# Altium PCB PCB1.PcbDoc
Units mm, origin at the board's own origin, x right, y up, seen from the top; angles counter-clockwise.
Board outline 101.33 x 51.28 mm, 2 copper layers (Top Layer, Bottom Layer), stack 1.47 mm thick; 135 components, 70 nets, 381 pads, 0 vias.
Unrouted connection lines stored in the file: 229.
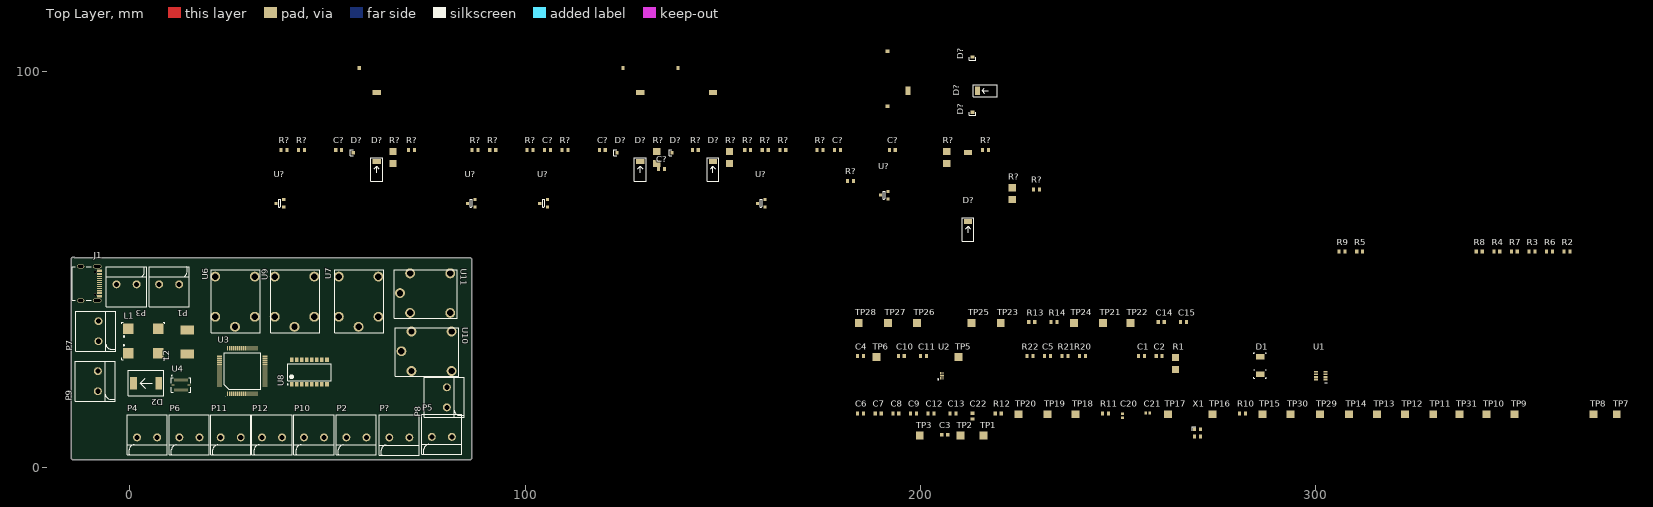
[diagram p0: Top Layer view]
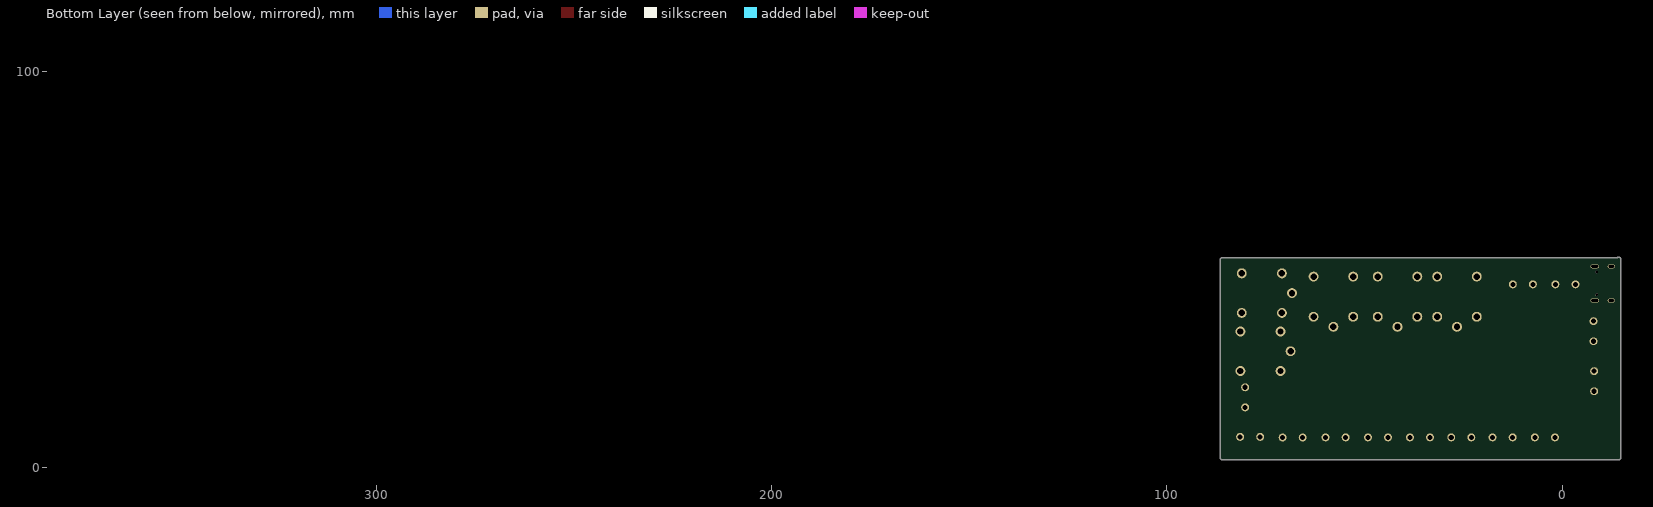
[diagram p1: Bottom Layer view, seen from below]

## Layer stack, top to bottom
Top Solder: solder mask 0.0254, SM-002, Dk 4
Top Layer: signal copper 0.035
Dielectric 1: dielectric 1.4, FR-4, Dk 4.8
Bottom Layer: signal copper 0.035
Bottom Solder: solder mask 0.0254, SM-002, Dk 4

## Board outline
-14.3,1.875 cw(c-14.3,2.375) -14.766,2.556 -14.775,2.65 -14.775,52.65 cw(c-14.275,52.65) -13.895,52.975 85.9,52.975 85.962,52.971 cw(c86.025,52.475) 86.525,52.475 86.525,2.375 cw(c86.025,2.375) 86.025,1.875

## Design rules (kind name [scope] priority, off if disabled: settings)
Clearance [All] p1: gap=0.2 ignorepadtopadclearanceinfootprint=FALSE except(0: Arc-Hole Track-Hole SMDPad-Hole THPad-Hole Via-Hole Fill-Hole Poly-Hole Region-Hole Text-Hole)
HoleToHoleClearance [All] p1: gap=0.2 allowstackedmicrovias=TRUE
PolygonConnect [All] p1: connectstyle=Relief reliefconductorwidth=0.254 reliefentries=4 polygonreliefangle="90 Angle" airgapwidth=0.254
RoutingVias [All] p1: holewidth=0.15 width=0.3 viastyle="Through Hole" minholewidth=0.15 minwidth=0.3 maxholewidth=0.3 maxwidth=0.45
SilkToSilkClearance [All] p1: silktosilkclearance=0.1
SilkToSolderMaskClearance [IsPad] p1: minsilkscreentomaskgap=0.1 clearancetoexposedcopper=TRUE
SolderMaskExpansion [All] p1: expansion=0.102 istentingtop=FALSE
UnRoutedNet [All] p1: checkbadconnections=TRUE
Width [All] p1: maxlimit=1.2 minlimit=0.2 preferedwidth=0.254
26 further rules are at their usual default settings.

## Classes and differential pairs
component class Designator: C? D? P2 P3 P4 P5 P6 P7 P8 P9 P10 P11 P12 P? R2 R3 R4 R5 R6 R7 R8 R9 R? U6 U7 U8 U9 U10 U11 U?

## Components (designator, comment, footprint, x,y, rotation, side; value= is the part's Value field where it differs from the comment)
C1 "4.7uF" CAP_0603 255.987,28.075 r0 top
C2 "4.7uF" CAP_0603 260.437,28.075 r0 top
C3 "10nF" CAP_0603 206.184,8.199 r0 top
C4 "100nF" CAP_0603 184.908,28.075 r0 top
C5 "100nF" CAP_0603 232.161,28.075 r0 top
C6 "100nF" CAP_0603 184.908,13.599 r0 top
C7 "100nF" CAP_0603 189.358,13.599 r0 top
C8 "100nF" CAP_0603 193.809,13.599 r0 top
C9 "100nF" CAP_0603 198.259,13.599 r0 top
C10 "100nF" CAP_0603 195.209,28.075 r0 top
C11 "100nF" CAP_0603 200.784,28.075 r0 top
C12 "100nF" CAP_0603 202.709,13.599 r0 top
C13 "100nF" CAP_0603 208.284,13.599 r0 top
C14 "100nF" CAP_0603 260.962,36.7 r0 top
C15 "100nF" CAP_0603 266.562,36.7 r0 top
C20 "10pF" CAP_0402 251.187,12.999 r90 top
C21 "10pF" CAP_0402 257.537,13.699 r0 top
C22 "100nF" CAP_0603 213.21,12.899 r90 top
C? "100pF" CAP_0603 52.854,80.236 r0 top
C? "100pF" CAP_0603 179.085,80.236 r0 top
C? "100pF" CAP_0603 105.682,80.236 r0 top
C? "100pF" CAP_0603 119.558,80.236 r0 top
C? "100pF" CAP_0603 192.936,80.236 r0 top
C? "4.7uF" CAP_0603 134.508,75.486 r0 top
D1 "STPS360-Y" SOD-128 285.988,25.725 r90 top value=STPS360
D2 "LNBTVS3-220U" SMC-DO-214AB 4.15,21.25 r180 top
D? "GREEN" LED_0603_GREEN 124.008,79.536 r0 top
D? "GREEN" LED_0603_GREEN 213.177,90.55 r90 top
D? "D_SMA" "DO-214AC-2 (SMA)" 62.455,75.311 r90 top
D? "D_SMA" "DO-214AC-2 (SMA)" 147.559,75.311 r90 top
D? "GREEN" LED_0603_GREEN 57.305,79.536 r0 top
D? "D_SMA" "DO-214AC-2 (SMA)" 212.075,60.137 r90 top
D? "GREEN" LED_0603_GREEN 137.958,79.536 r0 top
D? "GREEN" LED_0603_GREEN 213.177,104.475 r90 top
D? "D_SMA" "DO-214AC-2 (SMA)" 216.427,95.25 r180 top
D? "D_SMA" "DO-214AC-2 (SMA)" 129.158,75.311 r90 top
J1 "USB4105-GF-A-060" USB4105-GF-A-060 -10.025,46.475 r270 top
L1 "" "WE-SL5 HC" 3.425,31.95 r0 top value=5uH
L2 "3.3uH" ASPI-0630HI-6R8M-T15 14.6,31.65 r90 top
P1 "WJ500V-5.08-2P" WJ500V-5.08-2P 15.045,50.695 r180 top
P2 "WJ500V-5.08-2P" WJ500V-5.08-2P 52.259,3.08 r0 top
P3 "WJ500V-5.08-2P" WJ500V-5.08-2P 4.27,50.695 r180 top
P4 "WJ500V-5.08-2P" WJ500V-5.08-2P -0.687,3.08 r0 top
P5 "WJ500V-5.08-2P" WJ500V-5.08-2P 73.885,3.205 r0 top
P6 "WJ500V-5.08-2P" WJ500V-5.08-2P 10.014,3.08 r0 top
P7 "WJ500V-5.08-2P" WJ500V-5.08-2P -3.48,29.31 r90 top
P8 "WJ500V-5.08-2P" WJ500V-5.08-2P 84.67,12.58 r90 top
P9 "WJ500V-5.08-2P" WJ500V-5.08-2P -3.63,16.66 r90 top
P10 "WJ500V-5.08-2P" WJ500V-5.08-2P 41.539,3.08 r0 top
P11 "WJ500V-5.08-2P" WJ500V-5.08-2P 20.464,3.08 r0 top
P12 "WJ500V-5.08-2P" WJ500V-5.08-2P 30.915,3.08 r0 top
P? "WJ500V-5.08-2P" WJ500V-5.08-2P 63.13,3.055 r0 top
R1 "R1206" RES_1206 264.587,26.2 r90 top
R2 "100R" RES_0603 363.642,54.526 r0 top
R3 "100R" RES_0603 354.742,54.526 r0 top
R4 "100R" RES_0603 345.866,54.526 r0 top
R5 "100R" RES_0603 311.164,54.526 r0 top
R6 "100R" RES_0603 359.192,54.526 r0 top
R7 "100R" RES_0603 350.291,54.526 r0 top
R8 "100R" RES_0603 341.416,54.526 r0 top
R9 "100R" RES_0603 306.714,54.526 r0 top
R10 "0R" RES_0603 281.513,13.599 r0 top
R11 "10K" RES_0603 246.886,13.599 r0 top
R12 "10K" RES_0603 219.735,13.599 r0 top
R13 "4.7K" RES_0603 228.21,36.7 r0 top
R14 "4.7K" RES_0603 233.811,36.7 r0 top
R20 "100k" RES_0603 241.061,28.075 r0 top
R21 "142K" RES_0603 236.611,28.075 r0 top
R22 "13.6k" RES_0603 227.735,28.075 r0 top
R? "R0603" RES_0603 87.381,80.236 r0 top
R? "R0603" RES_0603 143.084,80.236 r0 top
R? "R0603" RES_0603 71.255,80.236 r0 top
R? "R1206" RES_1206 151.709,78.361 r90 top
R? "R0603" RES_0603 43.429,80.236 r0 top
R? "R0603" RES_0603 174.635,80.236 r0 top
R? "R0603" RES_0603 216.487,80.236 r0 top
R? "R0603" RES_0603 101.257,80.236 r0 top
R? "R0603" RES_0603 165.235,80.236 r0 top
R? "R1206" RES_1206 133.308,78.361 r90 top
R? "R0603" RES_0603 91.831,80.236 r0 top
R? "R0603" RES_0603 110.132,80.236 r0 top
R? "R1206" RES_1206 206.712,78.361 r90 top
R? "R0603" RES_0603 182.325,72.387 r0 top
R? "R0603" RES_0603 39.004,80.236 r0 top
R? "R0603" RES_0603 156.334,80.236 r0 top
R? "R1206" RES_1206 66.63,78.361 r90 top
R? "R1206" RES_1206 223.3,69.187 r90 top
R? "R0603" RES_0603 229.375,70.262 r0 top
R? "R0603" RES_0603 160.785,80.236 r0 top
TP1 "Pad" PAD_SQ_2MM 215.985,7.974 r0 top
TP2 "Pad" PAD_SQ_2MM 210.134,7.974 r0 top
TP3 "Pad" PAD_SQ_2MM 199.859,7.974 r0 top
TP5 "Pad" PAD_SQ_2MM 209.709,27.875 r0 top
TP6 "Pad" PAD_SQ_2MM 188.883,27.875 r0 top
TP7 "Pad" PAD_SQ_2MM 376.218,13.374 r0 top
TP8 "Pad" PAD_SQ_2MM 370.367,13.374 r0 top
TP9 "Pad" PAD_SQ_2MM 350.341,13.374 r0 top
TP10 "Pad" PAD_SQ_2MM 343.241,13.374 r90 top
TP11 "Pad" PAD_SQ_2MM 329.79,13.374 r90 top
TP12 "Pad" PAD_SQ_2MM 322.665,13.374 r90 top
TP13 "Pad" PAD_SQ_2MM 315.565,13.374 r90 top
TP14 "Pad" PAD_SQ_2MM 308.464,13.374 r90 top
TP15 "Pad" PAD_SQ_2MM 286.613,13.374 r90 top
TP16 "Pad" PAD_SQ_2MM 273.913,13.374 r90 top
TP17 "Pad" PAD_SQ_2MM 262.687,13.374 r90 top
TP18 "Pad" PAD_SQ_2MM 239.311,13.374 r90 top
TP19 "Pad" PAD_SQ_2MM 232.186,13.374 r90 top
TP20 "Pad" PAD_SQ_2MM 224.835,13.374 r90 top
TP21 "Pad" PAD_SQ_2MM 246.261,36.5 r90 top
TP22 "Pad" PAD_SQ_2MM 253.137,36.5 r90 top
TP23 "Pad" PAD_SQ_2MM 220.36,36.5 r90 top
TP24 "Pad" PAD_SQ_2MM 238.911,36.5 r90 top
TP25 "Pad" PAD_SQ_2MM 213.01,36.5 r90 top
TP26 "Pad" PAD_SQ_2MM 199.159,36.5 r90 top
TP27 "Pad" PAD_SQ_2MM 191.809,36.5 r90 top
TP28 "Pad" PAD_SQ_2MM 184.433,36.5 r90 top
TP29 "Pad" PAD_SQ_2MM 301.089,13.374 r90 top
TP30 "Pad" PAD_SQ_2MM 293.714,13.374 r90 top
TP31 "Pad" PAD_SQ_2MM 336.391,13.374 r90 top
U1 "SY8303AIC" TSOT23-8 301.289,23.15 r90 top
U2 "MIC5528-3.3YMT-TR" TDFN-6 205.534,23.15 r90 top
U3 "STM32L072RBT6" "LQFP64 - 64-pin" 24.7,18.55 r0 top
U4 "BMI088" BMI088 12.975,20.775 r0 top
U6 "SRA-05VDC-CL" SRA-05VDC-CL 32.979,33.986 r90 top
U7 "SRA-05VDC-CL" SRA-05VDC-CL 64.246,33.986 r90 top
U8 "SFH6916" VISH-SOP-16_V 45.45,24.025 r90 top
U9 "SRA-05VDC-CL" SRA-05VDC-CL 48.029,33.986 r90 top
U10 "SRA-05VDC-CL" SRA-05VDC-CL 67.201,22.975 r0 top
U11 "SRA-05VDC-CL" SRA-05VDC-CL 66.861,37.679 r0 top
U? "S9013" SOT-23-3 159.785,66.736 r90 top
U? "S9013" SOT-23-3 38.004,66.736 r90 top
U? "S9013" SOT-23-3 86.381,66.736 r90 top
U? "S9013" SOT-23-3 190.9,68.825 r90 top
U? "S9013" SOT-23-3 104.682,66.736 r90 top
X1 "24MHz" XTAL_2520 270.137,8.674 r90 top

## Footprints (in the part's own frame and the unit in brackets; to place one, negate y for a bottom-side part, rotate by r counter-clockwise, add the part's x,y. Pads: shape width x height; smd on the part's side, far side on the other; paste and mask are expansions set on the pad)
ASPI-0630HI-6R8M-T15 [mm]
  rect 2.35x3.4 smd: 1(-3.025,0) 2(3.025,0)
  body extent -3.6,-3.32 3.6,3.32, height 3.01
BMI088 [mm]
  rect 0.3x0.75 smd: 1(-1.5,1.3) 2(-1,1.3) 3(-0.5,1.3) 4(0,1.3) 5(0.5,1.3) 6(1,1.3) 7(1.5,1.3) 9(1.5,-1.3) 10(1,-1.3) 11(0.5,-1.3) 12(0,-1.3) 13(-0.5,-1.3) 14(-1,-1.3) 15(-1.5,-1.3)
  rect 0.75x0.3 smd: 8(2.05,0) 16(-2.05,0)
  silkscreen extent -2.5,-1.8 2.5,2.51, body extent -2.25,-1.5 2.25,1.5, height 1.01
CAP_0402 [mm]
  rect 0.6x0.7 smd: 1(-0.5,0) 2(0.5,0)
  body extent -0.5,-0.26 0.5,0.26, height 0.37
CAP_0603 [mm]
  rect 0.8x1 smd: 1(-0.75,0) 2(0.75,0)
  body extent -0.8,-0.4 0.8,0.4, height 0.51
"DO-214AC-2 (SMA)" [mm]
  rect 1.27x2.1 smd: A(19.477,0) K(1.985,0)
  silkscreen extent -3,-1.5 3,1.5, body extent -2.6,-1.3 2.6,1.3, height 2.42
LED_0603_GREEN [mm]
  rect 0.8x1 smd: A(0.75,21.462) K(-0.75,0)
  silkscreen extent -1.5,-0.8 -0.8,0.8, body extent -0.8,-0.4 0.8,0.4, height 0.6
"LQFP64 - 64-pin" [mm] "LQFP64 - 64-pin"
  rect 0.3x1.2 smd: 1(0,0) 2(0.5,0) 3(1,0) 4(1.5,0) 5(2,0) 6(2.5,0) 7(3,0) 8(3.5,0) 9(4,0) 10(4.5,0) 11(5,0) 12(5.5,0) 13(6,0) 14(6.5,0) 15(7,0) 16(7.5,0) 33(7.5,11.5) 34(7,11.5) 35(6.5,11.5) 36(6,11.5) 37(5.5,11.5) 38(5,11.5) 39(4.5,11.5) 40(4,11.5) 41(3.5,11.5) 42(3,11.5) 43(2.5,11.5) 44(2,11.5) 45(1.5,11.5) 46(1,11.5) 47(0.5,11.5) 48(0,11.5)
  rect 1.2x0.3 smd: 17(9.5,2) 18(9.5,2.5) 19(9.5,3) 20(9.5,3.5) 21(9.5,4) 22(9.5,4.5) 23(9.5,5) 24(9.5,5.5) 25(9.5,6) 26(9.5,6.5) 27(9.5,7) 28(9.5,7.5) 29(9.5,8) 30(9.5,8.5) 31(9.5,9) 32(9.5,9.5) 49(-2,9.5) 50(-2,9) 51(-2,8.5) 52(-2,8) 53(-2,7.5) 54(-2,7) 55(-2,6.5) 56(-2,6) 57(-2,5.5) 58(-2,5) 59(-2,4.5) 60(-2,4) 61(-2,3.5) 62(-2,3) 63(-2,2.5) 64(-2,2)
  silkscreen extent -0.82,-0.79 8.41,10.44, body extent -2.32,-0.29 9.68,11.72, height 1.5
PAD_SQ_2MM [mm]
  rect 2x2 smd paste-1: 1(0,0)
RES_0603 [mm]
  rect 0.8x1 smd: 1(-0.75,0) 2(0.75,0)
  body extent -0.8,-0.43 0.8,0.43, height 0.52
RES_1206 [mm]
  rect 1.8x1.84 smd: 1(-1.5,0) 2(1.5,0)
  body extent -1.6,-0.83 1.6,0.83, height 0.57
SMC-DO-214AB [mm]
  rect 1.72x3.2 smd: A(-3.2,0) K(3.2,0)
  silkscreen extent -4.5,-3.25 4.5,3.25, body extent -3.98,-2.95 3.98,2.95, height 2.32
SOD-128 [mm] "Diode SOD-128 Footprint"
  rect 1.4x2.1 smd: 1(-2.2,0) 2(2.2,0)
  silkscreen extent -3.18,-1.58 3.18,1.58, body extent -2.5,-1.35 2.5,1.35, height 1.1
SOT-23-3 [mm]
  rect 0.764x0.8 smd: 1(-0.96,-0.97) 2(0.96,-0.97) 3(0,0.97)
  silkscreen extent -1,-0.25 1,0.25, body extent -1.45,-1.15 1.45,1.15, height 1.01
SRA-05VDC-CL [mil] "5V 10A 20A@14VAC SPDT (1 Form C) 5 Plugin,12.4x16mm Power Relays ROHS"
  round 99 hole 63 mask+4: 1(60,250) 2(160,53) 3(560,53) 4(560,447) 5(160,447)
  silkscreen extent 0,0 630,485, body extent 0,0 625,475, height 559
TDFN-6 [mm]
  rect 0.6x0.2 smd mask+0.05: 1(-0.65,0.4) 2(-0.65,0) 3(-0.65,-0.4) 4(0.65,-0.4) 5(0.65,0) 6(0.65,0.4)
  rect 0.35x0.99 smd mask+0.05: 7(0,0)
  silkscreen extent -1.07,0.87 -0.83,1.12, body extent -0.65,-0.6 0.65,0.6, height 0.6
TSOT23-8 [mm]
  rect 0.45x1 smd: 1(-0.975,-1.2) 2(-0.325,-1.2) 3(0.325,-1.2) 4(0.975,-1.2) 5(0.975,1.2) 6(0.325,1.2) 7(-0.325,1.2) 8(-0.975,1.2)
  silkscreen extent -1.75,-1.63 -1.75,-1, body extent -1.45,-1.4 1.45,1.4, height 1.01
USB4105-GF-A-060 [mm]
  rect 0.6x1.15 smd mask+0.05: A1B12(-3.2,2.378) A4B9(-2.4,2.378) B1A12(3.2,2.378) B4A9(2.4,2.378)
  rect 0.3x1.15 smd mask+0.05: A5(-1.25,2.378) A6(-0.25,2.378) A7(0.25,2.378) A8(1.25,2.378) B5(1.75,2.378) B6(0.75,2.378) B7(-0.75,2.378) B8(-1.75,2.378)
  round 0.65 hole 0.65 unplated mask+0.05: MH(-2.89,1.303) MH(2.89,1.303)
  oval 1x2.1 hole 0.6 slot 1.7 at 90 deg: SH(-4.32,1.803) SH(4.32,1.803)
  oval 1x1.8 hole 0.6 slot 1.4 at 90 deg: SH(-4.32,-2.377) SH(4.32,-2.377)
  silkscreen extent -4.25,-4.5 4.25,0.25, body extent -4.47,-4.97 4.47,2.73, height 3.27
VISH-SOP-16_V [mm] "SOP, 16-Leads, Body 10.77x4.575mm, Pitch 1.27mm"
  rect 1.14x0.91 smd: 1(-3.11,4.445) 2(-3.11,3.175) 3(-3.11,1.905) 4(-3.11,0.635) 5(-3.11,-0.635) 6(-3.11,-1.905) 7(-3.11,-3.175) 8(-3.11,-4.445) 9(3.11,-4.445) 10(3.11,-3.175) 11(3.11,-1.905) 12(3.11,-0.635) 13(3.11,0.635) 14(3.11,1.905) 15(3.11,3.175) 16(3.11,4.445)
  silkscreen extent -3.23,-5.5 2.15,5.57, body extent -3.44,-5.38 3.44,5.39, height 2.12
"WE-SL5 HC" [mm] "Common Mode Choke WE-SL5 HC Footprint"
  rect 2.7x2.7 smd: 1(-3.8,3.1) 2(-3.8,-3.1) 3(3.8,-3.1) 4(3.8,3.1)
  silkscreen extent -5.42,-4.73 5.42,4.72, body extent -4.75,-4.15 4.75,4.15, height 5.3
WJ500V-5.08-2P [mil] "1x2P 18A -40?~+105? 250V Green 14~30 Straight 5.08mm 2.5 1 2 Plugin,P=5.08mm Screw terminal ROHS"
  round 78.75 hole 51: 1(100,175) 2(300,175)
  silkscreen extent 0,0 400,400, body extent 3,1 397,355, height 994
XTAL_2520 [mm]
  rrect10% 0.9x0.8 smd mask+0: 1(-0.925,-0.725) 2(0.925,-0.725) 3(0.925,0.725) 4(-0.925,0.725)
  silkscreen extent 0.54,0.4 1.6,1.36, body extent -1.25,-1 1.25,1, height 0.8

## Part data
C1 C2 C3 C5 C?: library part CAP_0603_25V, "Capacitor SMD 0603 25V"
C4 C6 C7 C8 C9 C10 C11 C12 C13 C14 C15 C22 C? C? C? C? C?: library part CAP_0603_16V, "Capacitor SMD 0603 16V"
C20 C21: library part CAP_0402_16V, "Capacitor SMD 0402 16V"
D1: library part CMP-01-D000008-4, "Schottky 60V 3A Vf=0.610V SOD-128 -40°C +175°C", Current - Average Rectified=3A, Current - Reverse Leakage="150µA @ 60V", Internal Part Number=01D008, Manufacturer=STMicroelectronics, Manufacturer Part Number=STPS360AFY, Max Temperature=175°C, Min Temperature=-40°C, Package/Case=SOD-128, Ratings=AEC-Q101, Voltage - DC Reverse=60V, Voltage - Forward=610mV, Mounting Technology="Surface Mount", Pins=2, RoHS Compliant=YES
D2: library part D_TVS_BI_SMC, "Diode TVS / ESD Bidirectional SMC (DO-214AB)"
D? D? D? D? D?: library part LED_0603_GREEN, "LED 0603 GREEN SMD"
D? D? D? D? D?: "Diode SMD SMA (DO-214AA)"
J1: "USB Connector Type C SMT 12 Pin", Manufacturer=GCT, Manufacturer Part Number=USB4105-GF-A-060
L1: library part CMP-01-CMC000005-2, "5uH 5A 5.5mΩ 80V -40°C +125°C", Current Rating (Max)=5A, DC Resistance (DCR) (Max)=5.5mΩ, Impedance @ Frequency="500 Ohms @ 130MHz", Inductor Type="Common Mode Choke", Internal Part Number=01L003, Manufacturer="Wurth Elektronik", Manufacturer Part Number=744273501, Max Temperature=125°C, Min Temperature=-40°C, Package/Case="WE-SL5 HC", Voltage Rating=80V, Height (Max)=5.3mm, Mounting Technology=SMT, Pins=4, RoHS Compliant=YES, Shielding=Unshielded, Size / Dimension="9.50mm x 8.30mm"
L2: library part ASPI-0630HI-6R8M-T15, "6.5A 3.3uH ±20% 23mΩ SMD,6.6x7.2mm Inductors (SMD) ROHS", Manufacturer="SHOU HAN", Manufacturer Part Number=CYA0630-3.3UH
P1 P2 P3 P4 P5 P6 P7 P8 P9 P10 P11 P12 P?: "1x2P 18A -40℃~+105℃ 250V Green 14~30 Straight 5.08mm 2.5 1 2 Plugin,P=5.08mm Screw terminal ROHS"
R1 R? R? R? R? R?: library part RES_1206, "Resistor SMD 1206"
R2 R3 R4 R5 R6 R7 R8 R9 R10 R11 R12 R13 R14 R20 R21 R22 R? R? R? R? R? R? R? R? R? R? R? R? R? R? R?: library part RES_0603, "Resistor SMD 0603"
TP1 TP2 TP3 TP5 TP6 TP7 TP8 TP9 TP10 TP11 TP12 TP13 TP14 TP15 TP16 TP17 TP18 TP19 TP20 TP21 TP22 TP23 TP24 TP25 TP26 TP27 TP28 TP29 TP30 TP31: library part PAD_SQ_2MM, "Test Point Square 2mm"
U1: "High Efficiency Fast Response, 3A, 40V Input Synchronous Step Down Regulator", LCSC=C97054, Manufacturer=Silergy, Distributor Link=https://www.lcsc.com/product-detail/DC-DC-Converters_Silergy-Corp-SY8303AIC_C97054.html, Manufacturer Part Number=SY8303AIC
U2: "LDO Regulator 3V3 500mA 2.5V<Vin<5.5V", Manufacturer=Microchip, Manufacturer Part Number=MIC5528-3.3YMT-TR
U3: "128KB 1.8V~3.6V ARM-MSeries 20KB 32MHz FLASH 51 LQFP-64(10x10) Microcontroller Units (MCUs/MPUs/SOCs) ROHS"
U4: "Inertial Measurement Unit IMU 6-Axis LGA", Manufacturer=Bosch, Manufacturer Part Number=BMI088
U6 U7 U9 U10 U11: "5V 10A 20A@14VAC SPDT (1 Form C) 5 Plugin,12.4x16mm Power Relays ROHS"
U8: library part CMP-2000-07047-1, "Optocoupler, Phototransistor Output, Quad Channel, 50 mA, 1.15 V, -55 to 100 degC, 16-Pin SOP, Pb-Free, Tube", Collector Current (DC)=0.1A, Collector-Emitter Saturation Voltage=0.4V, Collector-Emitter Voltage=70V, Current Transfer Ratio=300%, Forward Current=50mA, Forward Voltage=1.4V, Isolation Voltage=3750V, Manufacturer=Vishay, Operating Temp Range=-55Cto100C, Operating Temperature Classification=Industrial, Package Description="16-Pin Small Outline Package Integrated Circuit, Body 4.575 x 10.77 mm, Pitch 1.27 mm", Package Reference=SOP-16, Package Type=SOP, Power Dissipation=0.15W, Reverse Breakdown Voltage=6V, Collector Current (DC) (Max)=0.1A, Datasheet URL=https://datasheet.ciiva.com/26913/sfh6916-26913222.pdf, Datasheet Version="Rev. 2.0, 12/2011", DELETED=Compliant, Input Type=DC, Manufacturer URL=http://www.vishay.com/, Mounting=SurfaceMount, Mounting Technology=SurfaceMount, Number of  Elements=4, Output Device=Transistor, Output Type=DC, Pin Count=16, Rad Hardened=No
U? U? U? U? U?: "SOT-23 Bipolar Transistors - BJT ROHS"
X1: library part XTAL_2520, "Crystal SMD 2520"

## Nets (pads, with @x,y where several pads share a name; then routed paths per layer and width w, separated by ;. In a path a pad name is that pad's centre, name@x,y a point inside that pad or via, vN(x,y) a via of type N, cw(c..) or ccw(c..) an arc to the next point about the centre after c; other vN are vias at no path point)
3V: C4.2 C6.2 C7.2 C8.2 C9.2 C11.2 C12.2 C13.2 C14.2 C15.2 P?.1 P?.2 R2.2 R3.2 R4.2 R5.2 R11.2 R13.2 R14.2 TP5.1 U2.1 U3.1 U3.13 U3.19 U3.32 U3.48 U3.64 U4.3 U4.7 U4.11 U4.14
5V: C5.2 C10.2 C?.2@135.258,75.486 D?.K@62.455,77.296 D?.K@129.158,77.296 D?.K@147.559,77.296 D?.K@212.075,62.122 D?.K@214.442,95.25 L2.2 R20.2 R?.2@66.63,79.861 R?.2@72.005,80.236 R?.2@133.308,79.861 R?.2@143.834,80.236 R?.2@151.709,79.861 R?.2@157.084,80.236 R?.2@206.712,79.861 R?.2@217.237,80.236 R?.2@223.3,70.687 R?.2@230.125,70.262 U2.6
A0_ACCEL: TP27.1 U3.40 U4.15
A0_GYRO: TP28.1 U3.39 U4.10
ADC1: P6.2 TP7.1 U3.14
ADC2: P7.2 TP8.1 U3.15
BOOT0: R12.2 U3.60
GND: C2.1 C4.1 C5.1 C6.1 C7.1 C8.1 C9.1 C10.1 C11.1 C12.1 C13.1 C14.1 C15.1 C20.1 C21.1 C22.1 C?.1@133.758,75.486 L1.3 P2.1 P3.1 P4.1 P5.1 P6.1 P7.1 R12.1 R21.1 R22.1 R?.1@38.254,80.236 R?.1@86.631,80.236 R?.1@100.507,80.236 R?.1@160.035,80.236 R?.1@173.885,80.236 U1.3 U1.4 U2.3 U2.7 U3.12 U3.18 U3.31 U3.47 U3.63 U4.2 U4.4 U4.6 U8.2 U8.4 U8.6 U8.8 U?.2 X1.2 X1.4
GND_A: C1.1 D2.A J1.A1B12 J1.B1A12 J1.SH L1.2 P1.2
GPIO1: R?.1@91.081,80.236 R?.1@181.575,72.387 R?.2@88.131,80.236 R?.2@175.385,80.236 TP29.1 U3.30
GPIO2: R?.1@164.485,80.236 R?.2@161.535,80.236 TP30.1 U3.29
GPIO3: TP18.1 U3.28
GPIO4: R?.1@42.679,80.236 R?.2@39.754,80.236 TP19.1 U3.27
GPIO5: R?.1@109.382,80.236 R?.2@102.007,80.236 TP20.1 U3.26
GPIO6: TP11.1 U3.25 U8.15
GPIO7: TP12.1 U3.24 U8.13
GPIO8: TP10.1 U3.23 U8.11
GPIO9: TP9.1 U3.22 U8.9
I2C_SCL: R14.1 TP21.1 U3.41 U4.8
I2C_SDA: R13.1 TP23.1 U3.43 U4.9
INT1_ACCEL: TP22.1 U3.38 U4.16
INT1_GYRO: TP25.1 U3.36 U4.12
INT2_ACCEL: TP24.1 U3.37 U4.1
INT2_GYRO: TP26.1 U3.35 U4.13
MCU_OSC_IN: C20.2 U3.3 X1.1
MCU_OSC_OUT: R10.2 U3.4
NetC1_2: C1.2 D1.1 L1.1 TP1.1
NetC2_2: C2.2 L1.4 R1.2 U1.5
NetC3_1: C3.1 L2.1 TP2.1 U1.6
NetC3_2: C3.2 U1.7
NetC?_1: C?.1@104.932,80.236 D?.A@129.158,94.788 D?.K@123.258,79.536 U9.2 U?.3@85.411,66.736
NetC?_2: C?.2@120.308,80.236 R?.2@110.882,80.236 U?.1@105.652,65.776
NetD1_2: D1.2 D2.K J1.A4B9 J1.B4A9 P1.1
NetD?_A: D?.A@191.715,91.3 R?.1@215.737,80.236
NetP2_2: P2.2 R6.1
NetP3_2: P3.2 R9.1
NetP4_2: P4.2 R7.1
NetP5_2: P5.2 R8.1
NetP8_1: P8.1 U6.3
NetP8_2: P8.2 U6.1
NetP9_1: P9.1 U7.3
NetP9_2: P9.2 U7.1
NetP10_1: P10.1 U9.3
NetP10_2: P10.2 U9.1
NetP11_1: P11.1 U10.3
NetP11_2: P11.2 U10.1
NetP12_1: P12.1 U11.3
NetP12_2: P12.2 U11.1
NetR1_1: R1.1 U1.8
NetR2_1: R2.1 U8.16
NetR3_1: R3.1 U8.14
NetR4_1: R4.1 U8.12
NetR5_1: R5.1 U8.10
NetR6_2: R6.2 U8.1
NetR7_2: R7.2 U8.3
NetR8_2: R8.2 U8.5
NetR9_2: R9.2 U8.7
NetR20_1: R20.1 R22.2 U1.1
NetR21_2: R21.2 U1.2
NetR?_1: R?.1@151.709,76.861 U10.5
NetTP6_1: TP6.1 U2.2
NRST: C22.2 R11.1 TP17.1 U3.7
RELAY_1: C?.1@192.186,80.236 D?.A@212.075,79.614 D?.K@213.177,103.725 U6.2 U?.3@189.93,68.825
RELAY_2: C?.1@178.335,80.236 D?.A@196.95,95.25 D?.K@213.177,89.8 U7.2 U?.3@158.815,66.736
SWCLK: TP14.1 U3.50
SWDIO: TP13.1 U3.46
UART_CLK: TP31.1 U3.42
UART_RX: TP15.1 U3.59
UART_TX: TP16.1 U3.58
XTAL: C21.2 R10.1 X1.3
pads on no net: C?.1@52.104,80.236 C?.1@118.808,80.236 C?.2@53.604,80.236 C?.2@106.432,80.236 C?.2@179.835,80.236 C?.2@193.686,80.236 D?.A@58.055,100.998 D?.A@62.455,94.788 D?.A@124.758,100.998 D?.A@138.708,100.998 D?.A@147.559,94.788 D?.A@191.715,105.225 D?.K@56.555,79.536 D?.K@137.208,79.536 J1.A5 J1.A6 J1.A7 J1.A8 J1.B5 J1.B6 J1.B7 J1.B8 J1.MH R?.1@66.63,76.861 R?.1@70.505,80.236 R?.1@133.308,76.861 R?.1@142.334,80.236 R?.1@155.584,80.236 R?.1@206.712,76.861 R?.1@223.3,67.687 R?.1@228.625,70.262 R?.2@44.179,80.236 R?.2@92.581,80.236 R?.2@165.985,80.236 R?.2@183.075,72.387 TP3.1 U2.4 U2.5 U3.2 U3.5 U3.6 U3.8 U3.9 U3.10 U3.11 U3.16 U3.17 U3.20 U3.21 U3.33 U3.34 U3.44 U3.45 U3.49 U3.51 U3.52 U3.53 U3.54 U3.55 U3.56 U3.57 U3.61 U3.62 U4.5 U6.4 U6.5 U7.4 U7.5 U9.4 U9.5 U10.2 U10.4 U11.2 U11.4 U11.5 U?.1@38.974,65.776 U?.1@87.351,65.776 U?.1@160.755,65.776 U?.1@191.87,67.865 U?.3@37.034,66.736 U?.3@103.712,66.736

## Silkscreen, mask and mechanical layers (free items; w line width, h text height)
Mechanical 1:
  lines w1: -14.3,2.375 86.025,2.375 86.025,52.475 ; -14.275,2.65 -14.275,52.65 ; -14.1,52.475 85.9,52.475

## Text inside footprints (layer, text, board x,y; h text height)
D2: Top 3D Body "K" at 2.233,20 h1 r180; Top 3D Body "A" at 6.733,20 h1 r180
D?: Top 3D Body "+" at 212.568,105.792 h0.5 r90
D?: Top 3D Body "+" at 212.568,91.867 h0.5 r90
D?: Top 3D Body "+" at 139.275,80.145 h0.5
D?: Top 3D Body "+" at 125.325,80.145 h0.5
D?: Top 3D Body "+" at 58.621,80.145 h0.5